# Altium PCB BF706_Core.PcbDoc (part 1 of 2)
Units mil, origin at the board's own origin, x right, y up, seen from the top; angles counter-clockwise.
Board outline 1878 x 1180 mil, 4 copper layers (Top Layer, GND, PWR, Bottom Layer), stack 40.642 mil thick; 58 components, 77 nets, 288 pads, 225 vias.
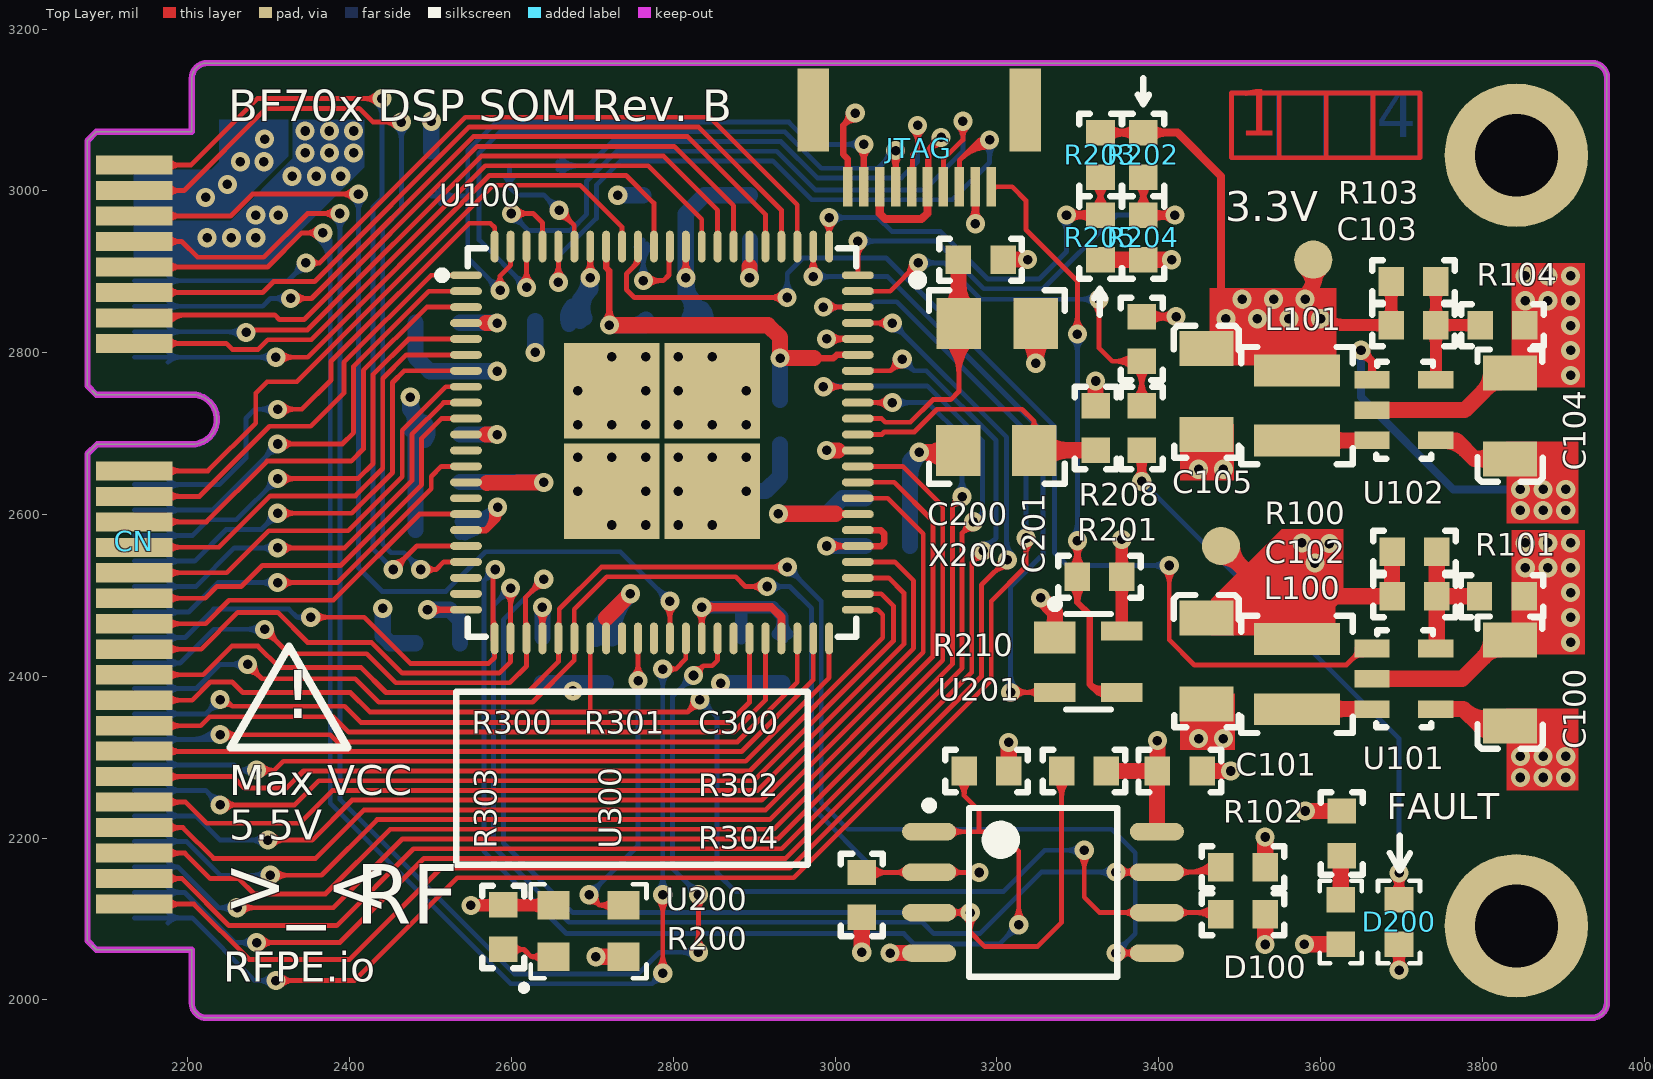
[diagram p0: Top Layer view]
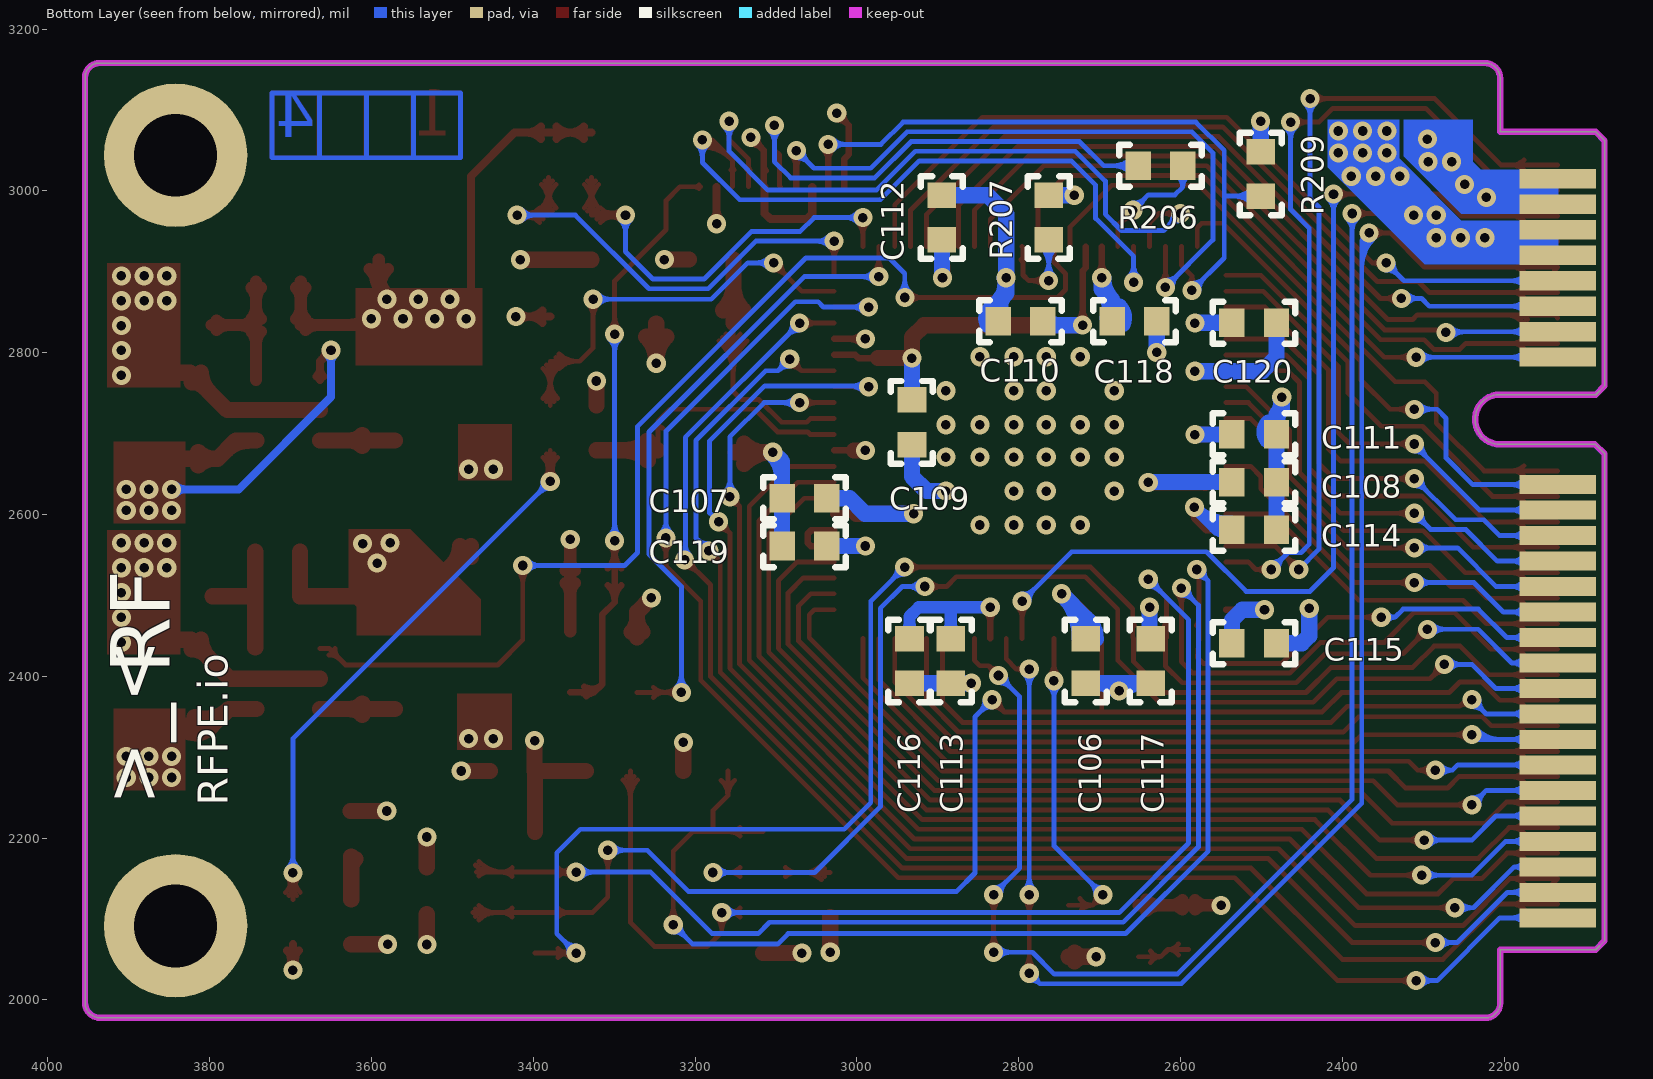
[diagram p1: Bottom Layer view, seen from below]
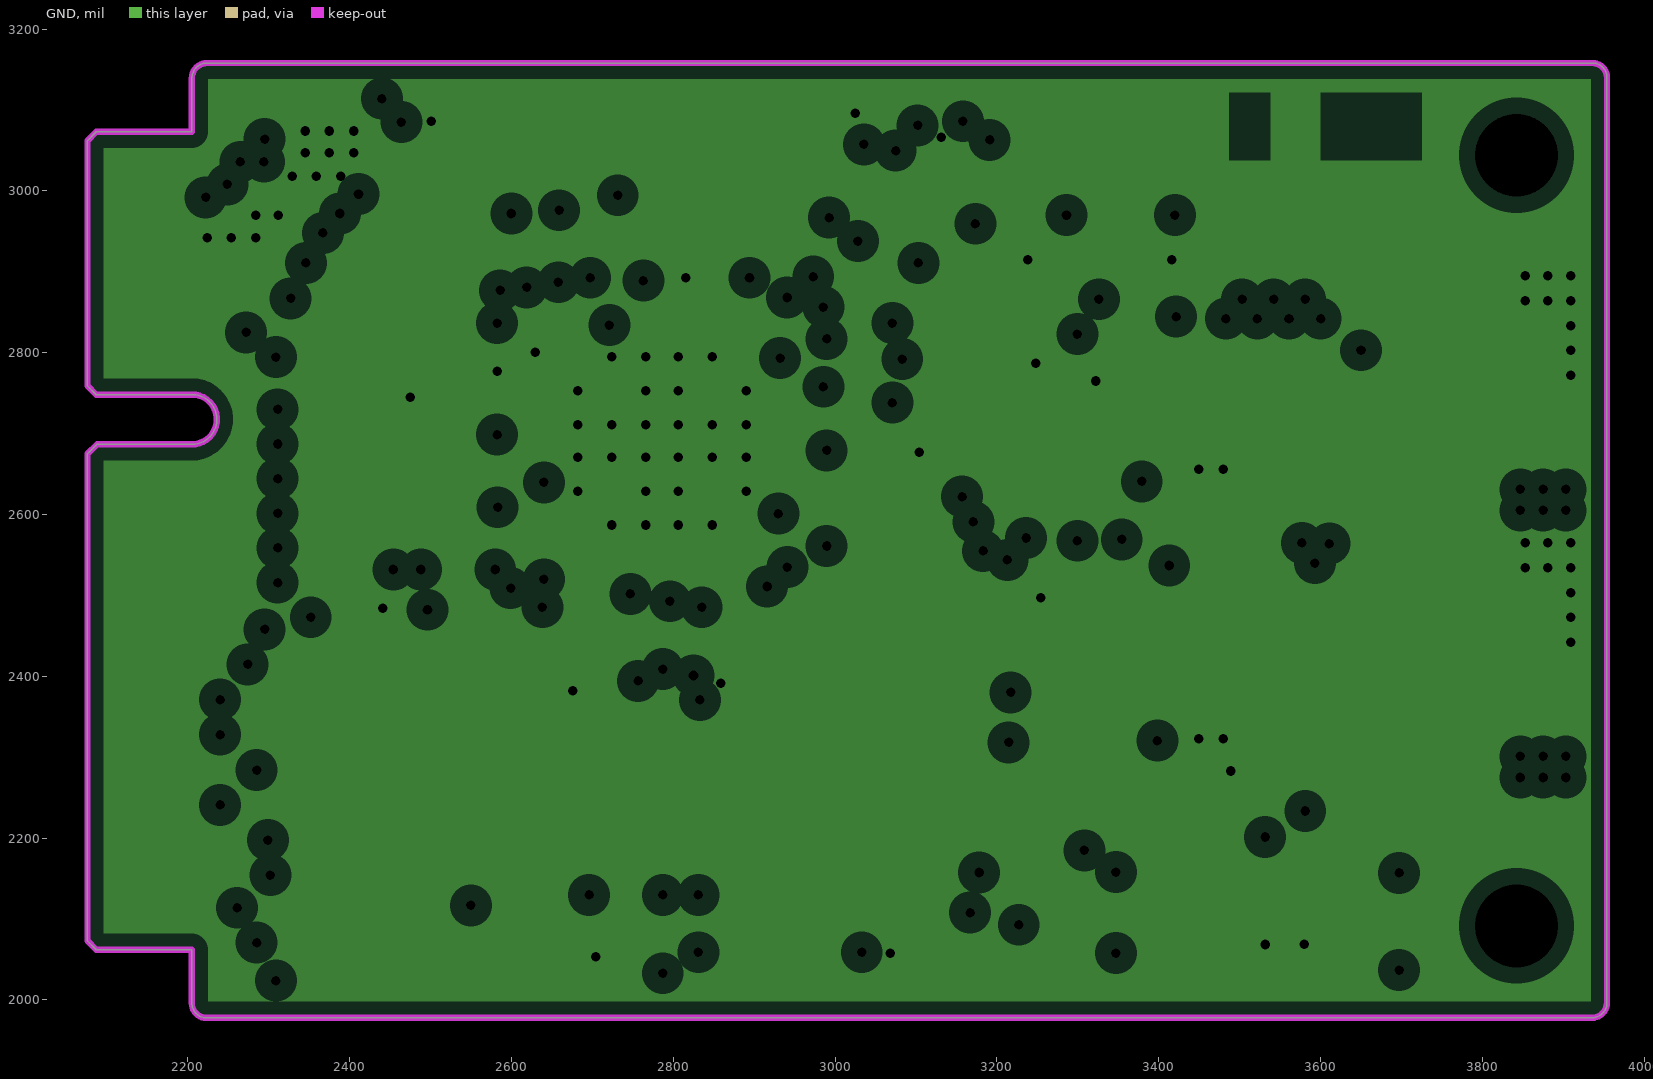
[diagram p2: GND, clearances drawn from the general rule]
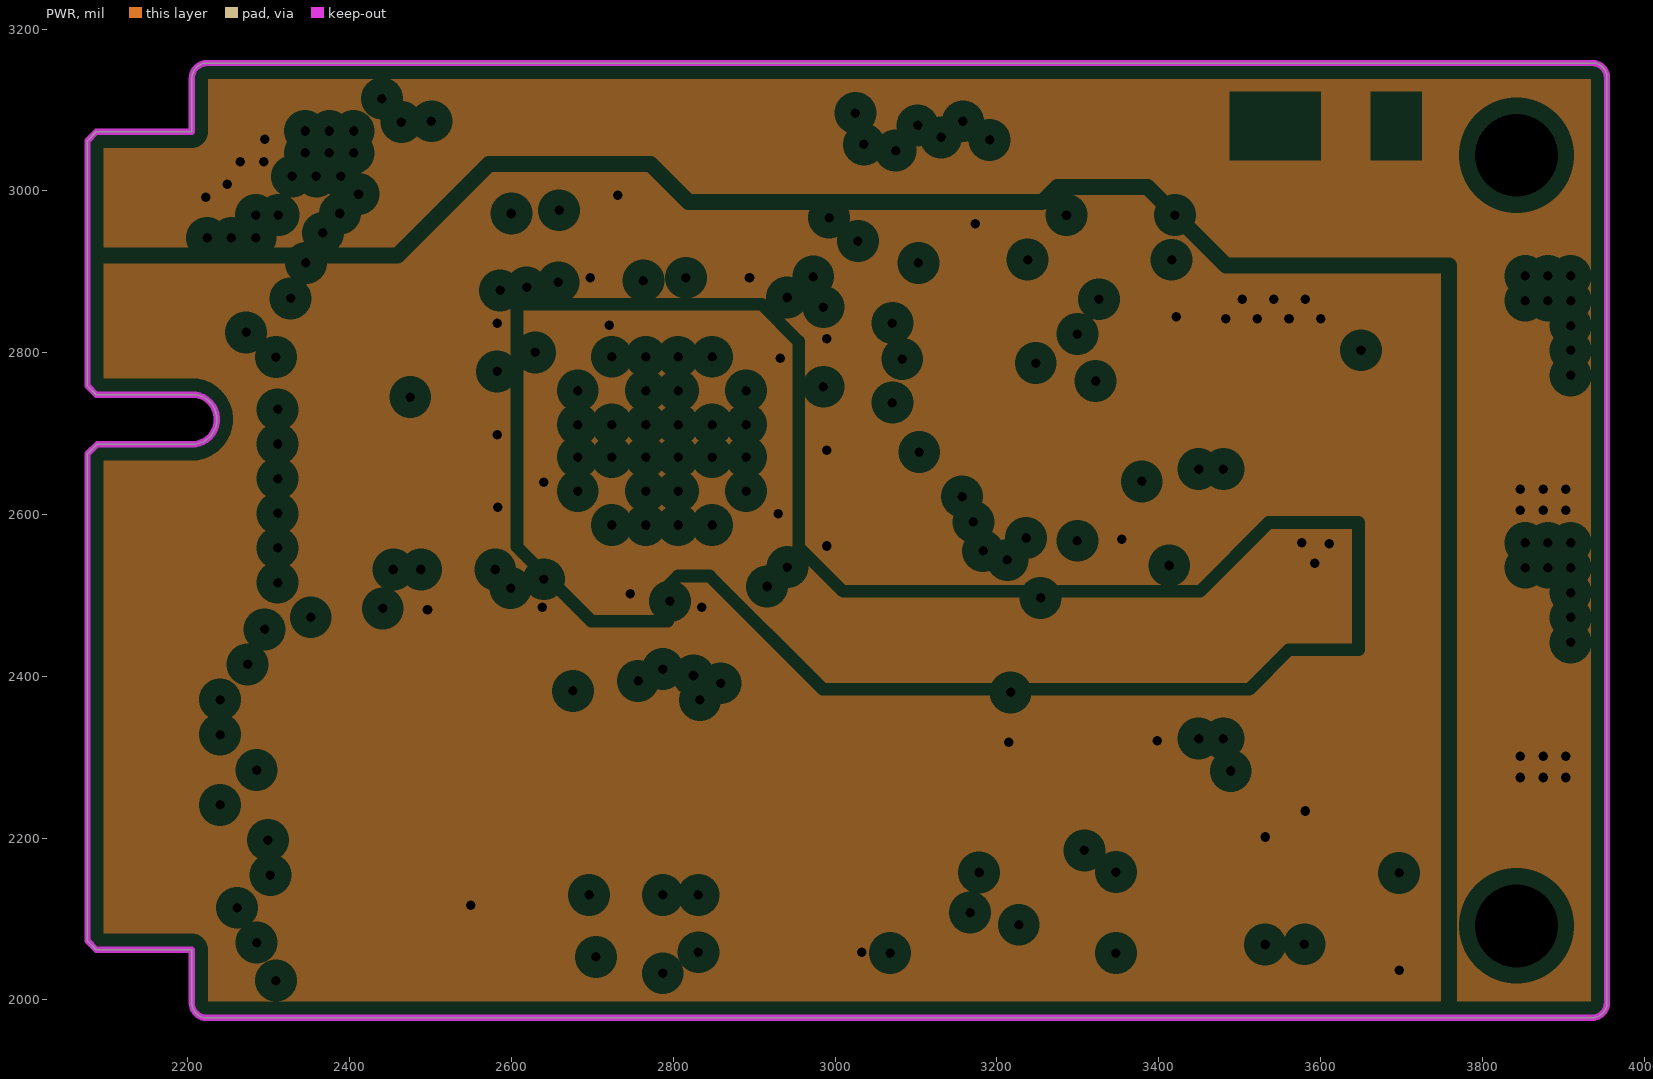
[diagram p3: PWR, clearances drawn from the general rule]

## Layer stack, top to bottom
Top Layer: signal copper 1.4
Dielectric: core 12.6, FR-4, Dk 4.8
GND: plane copper 1.4, net GND
Dielectric: prepreg 9.8425, FR-4, Dk 4.8
PWR: plane copper 1.4, net (Multiple Nets)
Dielectric: core 12.6, FR-4, Dk 4.8
Bottom Layer: signal copper 1.4

## Board outline
2076,2073 2087,2062 2205,2062 2205,1996 ccw(c2223,1996) 2223,1978 3935.25,1978 ccw(c3935.25,1996.75) 3954,1996.75 3954,3140 ccw(c3936,3140) 3936,3158 2224,3158 ccw(c2224,3139) 2205,3139 2205,3073 2087,3073 2076,3062 2076,2759 2087,2748 2210,2748 cw(c2205.2,2717.57) 2209,2687 2088,2687 2076,2675

## Design rules (kind name [scope] priority, off if disabled: settings)
Clearance [All] p1: gap=6
PlaneClearance [All] p1: clearance=20
PlaneConnect [All] p1: planeconnectstyle=Direct reliefexpansion=20 reliefentries=4 reliefconductorwidth=10 reliefairgap=10
PolygonConnect [All] p1: connectstyle=Relief reliefconductorwidth=10 reliefentries=4 polygonreliefangle="90 Angle"
RoutingVias [All] p1: holewidth=28 width=50 viastyle="Through Hole" minholewidth=28 minwidth=50 maxholewidth=28 maxwidth=50
SilkscreenOverComponentPads [All] p1: minsilkscreentomaskgap=10
SolderMaskExpansion [All] p1: expansion=4
Width [All] p1: maxlimit=10000 minlimit=6 preferedwidth=10
25 further rules are at their usual default settings.

## Classes and differential pairs
component class BF706_DSP: C300 CN R300 R301 R302 R303 R304 U100 U300
component class BF706_PWR: C100 C101 C102 C103 C104 C105 C106 C107 C108 C109 C110 C111 C112 C113 C114 C115 C116 C117 C118 C119 C120 D100 L100 R100 R101 R102 R103 R104 U101 U102
component class BF706-Sys: C200 C201 D200 JTAG R200 R201 R202 R203 R204 R205 R206 R207 R208 R209 R210 U200 U201 X200

## Components (designator, comment, footprint, x,y, rotation, side; value= is the part's Value field where it differs from the comment)
C100 "" C1206T 3833,2392 r270 top
C101 "" C1206T 3460,2419 r90 top
C102 "4.7uF" C0603 3716,2499 r180 top
C103 "4.7uF" C0603 3715,2834 r180 top
C104 "" C1206T 3833,2722 r270 top
C105 "" C1206T 3460,2752 r90 top
C106 "100nF" C0603 2717,2419 r270 bottom
C107 "100nF" C0603 3064.9,2620.1 r0 bottom
C108 "100nF" C0603 2509,2640 r180 bottom
C109 "100nF" C0603 2932,2714 r270 bottom
C110 "100nF" C0603 2798,2839 r0 bottom
C111 "100nF" C0603 2509,2699 r180 bottom
C112 "100nF" C0603 2895,2967 r90 bottom
C113 "100nF" C0603 2884,2419 r270 bottom
C114 "100nF" C0603 2509,2581 r180 bottom
C115 "100nF" C0603 2509,2441 r180 bottom
C116 "100nF" C0603 2935,2419 r270 bottom
C117 "100nF" C0603 2637,2419 r270 bottom
C118 "100nF" C0603 2657,2839 r180 bottom
C119 "100nF" C0603 3064.9,2561 r0 bottom
C120 "100nF" C0603 2509,2837 r180 bottom
C200 "18pF" C0603 3180,2915 r0 top
C201 "18pF" C0603 3322,2707 r90 top
C300 "100nF" C0603 3426,2283 r0 top
CN "MINI-PCIE" "PCI-E MALE" 2312,2719.9 r180 top locked
D100 "LED0" LED0603 3626,2097 r270 top
D200 "LED0" LED0603 3696,2095.88 r90 top
JTAG "Header 10" MOLEX-FPC-0.5-10 3116,3115 r180 top
L100 "SRN3015-2R2M" SRN3015 3571,2446 r270 top
L101 "SRN3015-2R2M" SRN3015 3571,2778 r270 top
R100 "10k" R0603 3716,2554 r180 top
R101 "12k" R0603 3824,2499 r180 top
R102 "" R0603 3626,2206 r270 top
R103 "45k" R0603 3715,2888 r180 top
R104 "12k" R0603 3825,2834 r180 top
R200 "10k" R0603 2590,2090 r270 top
R201 "" R0603 3379,2707 r90 top
R202 "10k" R0603 3381,3044.44 r270 top
R203 "DNP" R0603 3328,3044.44 r270 top
R204 "DNP" R0603 3381,2942.44 r270 top
R205 "10k" R0603 3328,2942.44 r270 top
R206 "0R" R0603 2625,3031 r0 bottom
R207 "10k" R0603 2763,2967 r270 bottom
R208 "10k" R0603 3379,2817 r270 top
R209 "10k" R0603 2501,3021 r90 bottom
R210 "10k" R0603 3327,2523 r0 top
R300 "10k" R0603 3187,2283 r180 top
R301 "10k" R0603 3307.5,2283 r180 top
R302 "10k" R0603 3504,2164 r180 top
R303 "10k" R0603 3033,2130 r90 top
R304 "10k" R0603 3504,2106 r0 top
U100 "ADSP-BF706" ADSP-BF706 2786,2689 r0 top locked
U101 "RT8059" APS1006 3703,2397 r0 top
U102 "RT8059" APS1006 3703,2729 r0 top
U200 "XTAL-25M" XTAL-25M-SMD 2709,2085 r0 top
U201 "MAX811" sot143 3313,2418 r0 top
U300 "M25P16" M25P80 3257,2133 r0 top
X200 "ABM3B-25.000MHZ-B2-T" XTAL5032 3199,2756 r270 top

## Footprints (in the part's own frame and the unit in brackets; to place one, negate y for a bottom-side part, rotate by r counter-clockwise, add the part's x,y. Pads: shape width x height; smd on the part's side, far side on the other; paste and mask are expansions set on the pad)
ADSP-BF706 [mm]
  oval 1x0.25 smd: 1(-6.15,5.25) 2(-6.15,4.75) 3(-6.15,4.25) 4(-6.15,3.75) 5(-6.15,3.25) 6(-6.15,2.75) 7(-6.15,2.25) 8(-6.15,1.75) 9(-6.15,1.25) 10(-6.15,0.75) 11(-6.15,0.25) 12(-6.15,-0.25) 13(-6.15,-0.75) 14(-6.15,-1.25) 15(-6.15,-1.75) 16(-6.15,-2.25) 17(-6.15,-2.75) 18(-6.15,-3.25) 19(-6.15,-3.75) 20(-6.15,-4.25) 21(-6.15,-4.75) 22(-6.15,-5.25) 45(6.15,-5.25) 46(6.15,-4.75) 47(6.15,-4.25) 48(6.15,-3.75) 49(6.15,-3.25) 50(6.15,-2.75) 51(6.15,-2.25) 52(6.15,-1.75) 53(6.15,-1.25) 54(6.15,-0.75) 55(6.15,-0.25) 56(6.15,0.25) 57(6.15,0.75) 58(6.15,1.25) 59(6.15,1.75) 60(6.15,2.25) 61(6.15,2.75) 62(6.15,3.25) 63(6.15,3.75) 64(6.15,4.25) 65(6.15,4.75) 66(6.15,5.25)
  oval 0.25x1 smd: 23(-5.25,-6.15) 24(-4.75,-6.15) 25(-4.25,-6.15) 26(-3.75,-6.15) 27(-3.25,-6.15) 28(-2.75,-6.15) 29(-2.25,-6.15) 30(-1.75,-6.15) 31(-1.25,-6.15) 32(-0.75,-6.15) 33(-0.25,-6.15) 34(0.25,-6.15) 35(0.75,-6.15) 36(1.25,-6.15) 37(1.75,-6.15) 38(2.25,-6.15) 39(2.75,-6.15) 40(3.25,-6.15) 41(3.75,-6.15) 42(4.25,-6.15) 43(4.75,-6.15) 44(5.25,-6.15) 67(5.25,6.15) 68(4.75,6.15) 69(4.25,6.15) 70(3.75,6.15) 71(3.25,6.15) 72(2.75,6.15) 73(2.25,6.15) 74(1.75,6.15) 75(1.25,6.15) 76(0.75,6.15) 77(0.25,6.15) 78(-0.25,6.15) 79(-0.75,6.15) 80(-1.25,6.15) 81(-1.75,6.15) 82(-2.25,6.15) 83(-2.75,6.15) 84(-3.25,6.15) 85(-3.75,6.15) 86(-4.25,6.15) 87(-4.75,6.15) 88(-5.25,6.15)
  rect 3x3 smd: 89(-1.575,1.626) 90(1.575,1.626) 91(-1.575,-1.524) 92(1.575,-1.524)
  silkscreen extent -7.02,-6.1 6.1,6.1, body extent -6.05,-6.01 6.01,6.05, height 0.8
APS1006 [mm] "SOT23, 5-Leads, Body 3.0x2.6mm (max), Pitch 0.95mm, IPC Medium Density"
  rect 1.1x0.55 smd: 1(-1,0.95) 2(-1,0) 3(-1,-0.95) 4(1,-0.95) 5(1,0.95)
  silkscreen extent -0.86,-1.52 0.91,1.52, body extent -1.5,-1.5 1.5,1.5, height 1.42
C0603 [mm]
  rect 0.8x0.9 smd: 1(-0.7,0) 2(0.7,0)
  silkscreen extent -1.3,-0.66 1.3,0.66, body extent -0.86,-0.43 0.86,0.43, height 0.5
C1206T [mm]
  rect 1.1x1.7 smd: 1(1.35,0.025) 2(-1.35,0.025)
  silkscreen extent -2.08,-0.99 2.07,1.05, body extent -1.78,-0.81 1.77,0.86, height 1.01
LED0603 [mm]
  rect 0.8x0.9 smd: 1(-0.686,-0.025) 2(0.714,-0.025)
  silkscreen extent -1.28,-0.69 1.31,0.63, body extent -0.84,-0.48 0.86,0.42, height 0.9
M25P80 [mm] "SOIC, 8-Leads, Body 5.3x5.4mm (max), Pitch 1.27mm, IPC Medium Density"
  oval 1.7x0.55 smd: 1(-3.575,1.905) 2(-3.575,0.635) 3(-3.575,-0.635) 4(-3.575,-1.905) 5(3.575,-1.905) 6(3.575,-0.635) 7(3.575,0.635) 8(3.575,1.905)
  silkscreen extent -3.7,-2.65 2.33,2.85, body extent -4.05,-2.73 4.05,2.73, height 1.75
MOLEX-FPC-0.5-10 [mm]
  rect 0.3x1.25 smd: 1(-1.956,2.794) 2(-1.456,2.794) 3(-0.956,2.794) 4(-0.456,2.794) 5(0.044,2.794) 6(0.544,2.794) 7(1.044,2.794) 8(1.544,2.794) 9(2.044,2.794) 10(2.544,2.794)
  rect 1x2.6 smd: NC(-3.023,0.381) NC(3.632,0.381)
  body extent -3.27,-1.24 3.83,2.81, height 1.15
"PCI-E MALE" [mm]
  rect 2.4x0.6 smd: 1(4.521,-7.925) 3(4.521,-7.125) 5(4.521,-6.325) 7(4.521,-5.525) 9(4.521,-4.725) 11(4.521,-3.925) 13(4.521,-3.125) 15(4.521,-2.325) 17(4.521,1.675) 19(4.521,2.475) 21(4.521,3.275) 23(4.521,4.075) 25(4.521,4.875) 27(4.521,5.675) 29(4.521,6.475) 31(4.521,7.275) 33(4.521,8.075) 35(4.521,8.875) 37(4.521,9.675) 39(4.521,10.475) 41(4.521,11.275) 43(4.521,12.075) 45(4.521,12.875) 47(4.521,13.675) 49(4.521,14.475) 51(4.521,15.275)
  rect 2.4x0.6 smd far side: 2(4.521,-7.493) 4(4.521,-6.693) 6(4.521,-5.893) 8(4.521,-5.093) 10(4.521,-4.293) 12(4.521,-3.493) 14(4.521,-2.693) 16(4.521,-1.893) 18(4.521,2.107) 20(4.521,2.907) 22(4.521,3.707) 24(4.521,4.507) 26(4.521,5.307) 28(4.521,6.107) 30(4.521,6.907) 32(4.521,7.707) 34(4.521,8.507) 36(4.521,9.307) 38(4.521,10.107) 40(4.521,10.907) 42(4.521,11.707) 44(4.521,12.507) 46(4.521,13.307) 48(4.521,14.107) 50(4.521,14.907) 52(4.521,15.707)
R0603 [mm]
  rect 0.8x0.9 smd: 1(-0.7,0) 2(0.7,0)
  silkscreen extent -1.3,-0.66 1.3,0.66, body extent -0.86,-0.43 0.86,0.43, height 0.5
sot143 [mm] "SOT143, 4-Leads, Body 3.0x2.6mm (max), Pitch 1.92mm, IPC Medium Density"
  rect 1.3x1 smd: 1(-1.05,0.76)
  rect 1.3x0.6 smd: 2(-1.05,-0.96) 3(1.05,-0.96) 4(1.05,0.96)
  silkscreen extent -1.17,-1.5 0.7,1.93, body extent -1.21,-1.46 1.21,1.46, height 1
SRN3015 [mm]
  rect 1x2.7 smd: 1(0,0) 2(2.2,0)
  silkscreen extent -0.74,-1.75 2.95,1.75, body extent -0.41,-1.5 2.59,1.5, height 1.5
XTAL5032 [mil]
  rect 62.99x55.12 smd: 1(-80,-46) 2(77,-47) 3(77,47) 4(-80,49)
  silkscreen extent -140,-103 118,85, body extent -99,-64 97,64, height 39
XTAL-25M-SMD [mm]
  rect 1x0.9 smd: 1(-1.448,-0.803) 2(0.752,-0.803) 3(0.752,0.813) 4(-1.448,0.813)
  silkscreen extent -2.47,-1.87 1.47,1.47, body extent -1.93,-1.24 1.27,1.26, height 0.61

## Part data
C100 C101 C104 C105: library part "Cap Pol2", "Polarized Capacitor (Axial)"
C102 C103 C106 C107 C108 C109 C110 C111 C112 C113 C114 C115 C116 C117 C118 C119 C120 C200 C201 C300: library part Cap, "Capacitor"
D100 D200: "Typical INFRARED GaAs LED"
JTAG: "Header, 10-Pin"
L100 L101 R100 R101 R102 R103 R104 R200 R201 R202 R203 R204 R205 R206 R207 R208 R209 R210 R300 R301 R302 R303 R304: library part Res1, "Resistor"
X200: library part XTAL-25M-SMD

## Free pads (board coordinates)
  round 47.24 smd: 1(3477,2561) 1(3591,2915)
  round 177.17 hole 102.36: SCREW(3842,2091.63) SCREW(3842,3044)

## Via types
v1: diameter 23.62, hole 11.81, Top Layer to Bottom Layer, tented both sides, 225 vias

## Nets (pads, with @x,y where several pads share a name; then routed paths per layer and width w, separated by ;. In a path a pad name is that pad's centre, name@x,y a point inside that pad or via, vN(x,y) a via of type N, cw(c..) or ccw(c..) an arc to the next point about the centre after c; other vN are vias at no path point)
D3V3: C103.2 C105.1 C111.1 C112.1 C113.1 C114.1 C115.1 C116.1 C117.1 C118.1 C119.1 C120.1 C300.1 D200.1 JTAG.2 L101.1 pad.1@3591,2915 R102.1 R103.2 R200.1 R202.1 R203.1 R207.1 R208.1 R210.2 R300.1 R301.1 R302.1 R303.1 U100.4 U100.11 U100.17 U100.22 U100.26 U100.36 U100.41 U100.49 U100.50 U100.55 U100.62 U100.72 U100.82 U200.4 U201.4 U300.8 | length 4004.9
  Top Layer w8: v1(2496.31,2482.31) U100.22@2543.87,2482.31 ; v1@2501.83,2476.78 cw(c2515.16,2463.45) 2515.16,2482.31 cw(c2515.16,2501.16) v1@2501.83,2487.83 ; U100.17@2543.87,2580.73 2568.54,2580.73 ; U100.11@2543.87,2698.84 2568.54,2698.84 ; U100.4@2543.87,2836.64 2568.54,2836.64 ; v1@2575.47,2606.93 cw(c2549.49,2599.79) 2568.54,2580.73 ; v1@2575.67,2694.81 ccw(c2568.54,2690.52) 2568.54,2698.84 ; v1@2575.67,2702.87 cw(c2568.54,2707.17) 2568.54,2698.84 ; v1@2575.67,2832.61 ccw(c2568.54,2828.31) 2568.54,2836.64 ; v1@2575.67,2840.67 cw(c2568.54,2844.96) 2568.54,2836.64 ; v1@2576.84,2693.32 ccw(c2563.5,2679.99) 2563.5,2698.84 ccw(c2563.5,2717.7) v1@2576.84,2704.37 ; v1@2576.84,2831.11 ccw(c2563.5,2817.78) 2563.5,2836.64 ccw(c2563.5,2855.5) v1@2576.84,2842.16 ; 2578.27,2590.46 ccw(c2564.74,2603.98) v1@2583.18,2609.05 ; v1@2578.98,2602.3 cw(c2574.7,2595.19) 2583,2595.19 ; v1(2583,2609) 2583,2595.19 ; v1@2587.02,2602.3 ccw(c2591.3,2595.19) 2583,2595.19 ; v1@2632.84,2479.84 cw(c2619.5,2466.5) 2638.36,2466.5 cw(c2657.22,2466.5) v1@2643.89,2479.84 ; U100.26@2638.36,2446.87 v1(2638.36,2485.36) ; v1@2691.89,2898.16 ccw(c2678.56,2911.5) 2697.42,2911.5 ccw(c2716.27,2911.5) v1@2702.94,2898.16 ; v1(2697.42,2892.64) U100.82@2697.42,2931.13 ; v1@2829.69,2479.84 cw(c2816.36,2466.5) 2835.21,2466.5 cw(c2854.07,2466.5) v1@2840.74,2479.84 ; U100.36@2835.21,2446.87 v1(2835.21,2485.36) ; v1@2888.74,2898.16 ccw(c2875.41,2911.5) 2894.27,2911.5 ccw(c2913.13,2911.5) v1@2899.79,2898.16 ; v1@2890.24,2899.33 ccw(c2885.94,2906.46) 2894.27,2906.46 ; U100.72@2894.27,2931.13 2894.27,2906.46 ; v1@2898.3,2899.33 cw(c2902.59,2906.46) 2894.27,2906.46 ; v1(2989.64,2561.05) U100.49@3028.13,2561.05 3057.05,2561.05 3061,2565 3061,2576 3056.27,2580.73 U100.50@3028.13,2580.73 ; v1(2989.64,2816.95) U100.62@3028.13,2816.95 ; v1@2995.16,2555.52 cw(c3008.5,2542.19) 3008.5,2561.05 cw(c3008.5,2579.9) v1@2995.16,2566.57 ; v1@2995.16,2673.63 cw(c3008.5,2660.3) 3008.5,2679.16 cw(c3008.5,2698.01) v1@2995.16,2684.68 ; v1@2995.16,2811.43 cw(c3008.5,2798.1) 3008.5,2816.95 cw(c3008.5,2835.81) v1@2995.16,2822.48 ; v1@2996.33,2675.13 cw(c3003.46,2670.83) 3003.46,2679.16 ; v1@2996.33,2683.19 ccw(c3003.46,2687.48) 3003.46,2679.16 ; U100.55@3028.13,2679.16 3003.46,2679.16 ; 2568.54,2580.73 2583,2595.19
  Top Layer w10: v1(2835.21,2485.36) 2921.64,2485.36 2933.64,2473.36 U100.41@2933.64,2446.87 ; v1@2840.03,2480.55 cw(c2851.66,2468.92) 2851.66,2485.36 cw(c2851.66,2501.81) v1@2840.03,2490.18 ; v1@3168.5,2964.13 ccw(c3156.87,2975.76) 3173.32,2975.76 ccw(c3189.76,2975.76) v1@3178.13,2964.13 ; v1(3173.32,2959.32) JTAG.2@3173.32,3005 ; R203.1@3328,3072 R202.1@3381,3072 3423,3072 3477,3018 3477,2870 ; R203.1@3337.57,3064.4 cw(c3355.92,3046.05) 3355.92,3072 cw(c3355.92,3097.95) R203.1@3337.57,3079.6 ; R202.1@3371.43,3064.4 ccw(c3353.08,3046.05) 3353.08,3072 ccw(c3353.08,3097.95) R202.1@3371.43,3079.6 ; R208.1@3379,2844.56 v1(3421.44,2844.56) ; R208.1@3388.57,2836.96 cw(c3406.92,2818.61) 3406.92,2844.56 cw(c3406.92,2870.51) R208.1@3388.57,2852.16 ; R202.1@3390.57,3064.4 cw(c3408.92,3046.05) 3408.92,3072 cw(c3408.92,3097.95) R202.1@3390.57,3079.6 ; v1@3416.62,2839.74 ccw(c3405,2828.12) 3405,2844.56 ccw(c3405,2861) v1@3416.62,2849.38 ; D200.1@3689.4,2061.28 cw(c3671.05,2042.93) 3697,2042.93 cw(c3722.95,2042.93) D200.1@3704.6,2061.28 ; v1@3691.68,2041.25 ccw(c3681,2049.8) D200.1@3694.21,2053.34 ; v1@3692.18,2041.82 ccw(c3680.56,2053.44) 3697,2053.44 ccw(c3713.44,2053.44) v1@3701.82,2041.82 ; v1@3693.59,2042.9 ccw(c3687.99,2052.6) 3698.81,2049.7 ; 3695.19,2049.7 ccw(c3706.01,2052.6) v1@3700.41,2042.9 ; v1(3697,2037) D200.1@3697,2068.88 ; D200.1@3699.79,2053.34 ccw(c3713,2049.8) v1@3702.32,2041.25
  Top Layer w15: v1(2550,2117) U200.4@2652,2117 ; 2566.77,2117 ccw(c2566.77,2138.82) R200.1@2582.2,2123.39 ; 2569.47,2117 cw(c2569.47,2099) R200.1@2582.2,2111.73 ; R200.1@2597.8,2111.73 cw(c2610.53,2099) 2610.53,2117 ; R200.1@2597.8,2123.39 ccw(c2613.23,2138.82) 2613.23,2117 ; U200.4@2642.81,2109.78 ccw(c2625.37,2092.34) 2625.37,2117 ccw(c2625.37,2141.66) U200.4@2642.81,2124.22 ; R210.2@3348.73,2515.2 cw(c3335.18,2501.65) 3354.34,2501.65 ; R210.2@3348.73,2530.8 ccw(c3335.18,2544.35) 3354.34,2544.35 ; U201.4@3354.34,2455.8 v1(3354.34,2569.34) ; 3354.34,2500.59 cw(c3375,2500.59) R210.2@3360.39,2515.2 ; 3354.34,2545.41 ccw(c3375,2545.41) R210.2@3360.39,2530.8 ; v1@3577.95,2869.05 ccw(c3546.45,2900.55) pad.1@3591,2900.55 ; v1@3578.84,2869.73 ccw(c3561.6,2899.59) 3594.91,2890.67 ; v1@3579.16,2869.9 ccw(c3567.25,2895.08) 3594.16,2887.87 ; pad.1@3579.6,2903.6 cw(c3552.08,2876.08) 3591,2876.08 cw(c3629.92,2876.08) pad.1@3602.4,2903.6 ; v1@3580.02,2861.8 cw(c3576.8,2847.97) v1@3591,2847.97 ; v1@3585.91,2875.49 cw(c3579.49,2863.07) 3592.99,2866.69 ; 3591,2851 pad.1@3591,2915 ; 3591,2874.14 ccw(c3632.14,2874.14) 3603.05,2845.05 ccw(c3629.72,2871.72) 3629.72,2834 ; v1@3605,2834 C103.2@3687.44,2834 R103.2@3687.44,2888 ; C103.2@3681.61,2828.17 ccw(c3667.53,2814.09) 3667.53,2834 ccw(c3667.53,2853.91) C103.2@3681.61,2839.83 ; C103.2@3681.61,2841.8 ccw(c3667.53,2855.88) 3687.44,2855.88 ccw(c3707.35,2855.88) C103.2@3693.27,2841.8 ; R103.2@3681.61,2880.2 cw(c3667.53,2866.12) 3687.44,2866.12 cw(c3707.35,2866.12) R103.2@3693.27,2880.2
  Top Layer w20: 2568.54,2698.84 v1(2582.36,2698.84) ; 2568.54,2836.64 v1(2582.36,2836.64) ; v1(2894.27,2892.64) 2894.27,2906.46 ; v1(2989.64,2679.16) 3003.46,2679.16 ; v1(3033,2059) R303.1@3033,2102.44 ; R300.1@3214.56,2283 v1(3214.56,2318.44) ; R301.1@3335.06,2283 C300.1@3398.44,2283 v1(3398.44,2320.56) ; U300.8@3397.75,2208 C300.1@3397.75,2282.31 ; R302.1@3531.56,2164 v1(3531.56,2201.44) ; v1(3581.12,2233.56) R102.1@3626,2233.56
  Bottom Layer w15: C114.1@2536.24,2576.22 ccw(c2537.68,2606.38) 2559.03,2585.03 ; C114.1@2536.56,2581 2555,2581 ; C114.1@2536.95,2591.21 ccw(c2539.88,2652.12) v1(2583,2609) 2555,2581 ; C114.1@2542.71,2575.5 cw(c2555,2564.51) 2555,2581 ; C114.1@2542.71,2586.5 ccw(c2555,2597.49) 2555,2581 ; v1(2835.21,2485.36) 2923.64,2485.36 2935,2474 C116.1@2935,2446.56 ; C113.1@2878.17,2452.39 ccw(c2864.09,2466.47) 2884,2466.47 ccw(c2903.91,2466.47) C113.1@2889.83,2452.39 ; C113.1@2884,2446.56 2884,2484.36 ; C116.1@2929.17,2452.39 ccw(c2915.09,2466.47) 2935,2466.47 ccw(c2954.91,2466.47) C116.1@2940.83,2452.39
  Bottom Layer w20: v1(2496.31,2482.31) 2523.69,2482.31 2536.56,2469.44 C115.1@2536.56,2441 ; C111.1@2536.56,2699 v1@2582.2,2699 ; C120.1@2536.56,2837 v1@2582,2837 ; C117.1@2638.36,2447.92 v1(2638.36,2485.36) ; C118.1@2671.26,2835.84 cw(c2689.48,2842.87) C118.1@2675.67,2856.67 ; C118.1@2684.56,2839 2684.56,2865.56 ; C118.1@2689.92,2843.04 cw(c2720.87,2854.97) 2697.42,2878.42 ; v1@2695.61,2892.62 cw(c2657.89,2892.23) 2684.56,2865.56 ; v1(2697.42,2892.64) 2697.42,2878.42 ; v1(2731.44,2994.56) R207.1@2763,2994.56 ; v1@2895,2893.37 C112.1@2895,2939.44 ; v1@2989.69,2561 C119.1@3037.34,2561 ; 2684.56,2865.56 2697.42,2878.42
  other v1: 3483,2842 3522,2842 3561,2842 3600,2842 3503,2866 3542,2866 3581,2866
D5V: C100.1 C104.1 CN.2 CN.4 U101.4 U102.1 U102.4 | length 828.1
  Top Layer w10: v1@3650,2796.19 cw(c3650,2779.75) 3661.63,2791.37 cw(c3673.25,2803) v1@3656.81,2803 ; v1(3650,2803) 3663.63,2789.37 U102.1@3663.63,2766.4 ; U102.1@3659.51,2770.52 ccw(c3649.56,2780.47) 3663.63,2780.47 ccw(c3677.7,2780.47) U102.1@3667.75,2770.52
  Top Layer w20: U101.4@3742.37,2359.6 3776.4,2359.6 ; U102.4@3742.37,2691.6 3767.4,2691.6 3790.15,2668.85 C104.1@3834,2668.85 ; U102.4@3753.2,2690.77 cw(c3753.2,2654.48) 3778.86,2680.14 ; 3799.06,2336.94 ccw(c3816.77,2354.64) C100.1@3824.9,2330.96 ; C100.1@3813.27,2331.35 ccw(c3797.15,2317.78) 3797.15,2338.85 ; C100.1@3813.27,2346.35 cw(c3797.15,2359.92) 3797.15,2338.85 ; C104.1@3813.95,2660.61 ccw(c3794.05,2640.72) 3794.05,2668.85 ccw(c3794.05,2696.98) C104.1@3813.95,2677.09 ; C100.1@3818.41,2349.87 cw(c3805.2,2388.39) 3776.4,2359.6 ; C100.1@3834,2338.85 3797.15,2338.85 ; 3776.4,2359.6 3797.15,2338.85
  Bottom Layer w10: v1@3645.18,2798.18 cw(c3633.56,2786.56) 3650,2786.56 cw(c3666.44,2786.56) v1@3654.82,2798.18 ; v1(3650,2803) 3650,2745 3764,2631 v1(3847,2631) ; v1@3842.18,2626.18 ccw(c3830.56,2614.56) 3830.56,2631 ccw(c3830.56,2647.44) v1@3842.18,2635.82
  other v1: 3847,2275 3875,2275 3903,2275 3847,2301 3875,2301 3903,2301 3847,2605 3875,2605 3903,2605 3875,2631 3903,2631 2222,2992 2249,3008 2265,3036 2294,3036 2295,3064
GND: C100.2 C101.2 C104.2 C105.2 C106.2 C107.2 C108.2 C109.2 C110.2 C111.2 C112.2 C113.2 C114.2 C115.2 C116.2 C117.2 C118.2 C119.2 C120.2 C200.2 C201.2 C300.2 CN.6 CN.8 D100.2 JTAG.5 JTAG.8 JTAG.10 R101.1 R104.1 R204.2 R205.2 R209.2 R304.2 U100.76 U100.89 U100.90 U100.91 U100.92 U101.2 U102.2 U200.2 U201.1 U300.4 X200.2 X200.4 | length 2921
  Top Layer w8: v1@2810,2898.16 ccw(c2796.67,2911.5) 2815.53,2911.5 ccw(c2834.38,2911.5) v1@2821.05,2898.16 ; v1(2815.53,2892.64) U100.76@2815.53,2931.13 ; JTAG.10@3015.83,3005 3015.83,3039.17 3010,3045 3010,3081 v1(3025,3096) ; v1@3017.19,3096 cw(c2998.33,3096) 3011.67,3082.67 cw(c3025,3069.33) v1@3025,3088.19 ; JTAG.5@3112.91,3025.05 ccw(c3107.87,3030.09) 3115,3030.09 ; JTAG.5@3114.26,3005 3115,3005.74 3115,3050 v1(3131,3066) ; v1@3123.19,3066 cw(c3104.33,3066) 3117.67,3052.67 cw(c3131,3039.33) v1@3131,3058.19
  Top Layer w10: JTAG.8@3055.2,3005 3055.2,2971.8 3062,2965 3107,2965 3114.26,2972.26 JTAG.5@3114.26,3005
  Top Layer w20: v1(2704.39,2053.39) U200.2@2738.61,2053.39 ; U200.2@2731.18,2047.93 ccw(c2718.01,2034.76) 2718.01,2053.39 ccw(c2718.01,2072.02) U200.2@2731.18,2058.84 ; v1(3068,2058) U300.4@3116.25,2058 ; v1(3104,2677) X200.2@3150,2677 ; v1@3104.93,2677 cw(c3104.93,2628) X200.2@3139.58,2662.65 ; v1@3114.29,2677 ccw(c3114.29,2712.78) X200.2@3139.58,2687.48 ; C200.2@3207.56,2915 v1(3238,2915) ; X200.4@3235.58,2819.65 cw(c3205.61,2789.67) 3248,2789.67 cw(c3290.39,2789.67) X200.4@3260.42,2819.65 ; v1(3248,2787) X200.4@3248,2836 ; v1(3254,2497) 3271.66,2479.34 U201.1@3271.66,2447.92 ; U201.1@3264.81,2454.77 ccw(c3248.28,2471.3) 3271.66,2471.3 ccw(c3295.04,2471.3) U201.1@3278.51,2454.77 ; C201.2@3322,2734.56 v1(3322,2765) ; R205.2@3328,2914.88 R204.2@3381,2914.88 v1(3415.88,2914.88) ; C300.2@3453.56,2283 v1(3489,2283) ; v1(3531.56,2068.56) R304.2@3531.56,2106 ; v1(3580.12,2068.88) D100.2@3625,2068.88 ; U101.2@3663.63,2397 3775,2397 3823.15,2445.15 C100.2@3834,2445.15 ; U102.2@3663.63,2729 3778,2729 3824.15,2775.15 C104.2@3834,2775.15 ; 3800.91,2751.91 ccw(c3777.67,2775.15) C104.2@3810.54,2775.15 ; C100.2@3801.62,2423.62 ccw(c3780.08,2445.15) C100.2@3810.54,2445.15 ; C100.2@3803.94,2425.94 cw(c3822.19,2407.68) C100.2@3822.19,2433.5 ; C104.2@3805.64,2756.64 cw(c3822.19,2740.1) C104.2@3822.19,2763.5
  Bottom Layer w20: v1(2441,2484) 2441,2450 2450,2441 C115.2@2481.44,2441 ; v1(2475,2745) 2475,2730 ; v1@2476.71,2744.4 ccw(c2495.62,2737.74) 2481.44,2723.56 ; C111.2@2476.84,2704.41 ccw(c2461.15,2716.14) 2475,2730 ; C114.2@2481.44,2581 C108.2@2481.44,2640 C111.2@2481.44,2699 2481.44,2723.56 ; C120.2@2481.44,2837 2481.44,2794.56 2499,2777 v1(2582.36,2777) ; C111.2@2491.33,2713.67 cw(c2479.83,2702.17) C111.2@2492.85,2692.43 ; R209.2@2501,3048.56 v1(2501,3086) ; v1(2629.44,2800.44) C118.2@2629.44,2839 ; C117.2@2637,2391.44 C106.2@2717,2391.44 ; C117.2@2648.84,2391.44 cw(c2648.84,2354.84) v1@2674.72,2380.72 ; v1(2676,2382) v1@2676,2390.44 ; v1@2677.28,2380.72 cw(c2703.16,2354.84) C106.2@2703.16,2391.44 ; v1@2817.29,2892.23 ccw(c2847.42,2885.3) 2825.56,2863.44 ; C110.2@2820.41,2843.53 ccw(c2797.16,2855.11) 2815.53,2873.47 ; C110.2@2825.56,2839 2825.56,2863.44 ; C110.2@2835.18,2853.82 cw(c2823.41,2842.04) C110.2@2838.32,2834.62 ; v1(2858.44,2391.44) C113.2@2884,2391.44 C116.2@2935,2391.44 ; v1(2890,2629) 2914,2629 2932,2647 C109.2@2932,2686.44 ; C112.2@2895,2994.56 2838.56,2994.56 2815.53,2971.53 v1(2815.53,2892.64) 2815.53,2873.47 ; C119.2@3092.46,2561 C107.2@3092.46,2620.1 3092.46,2665.46 v1(3104,2677) ; 3092.46,2644.76 cw(c3136.24,2644.76) v1@3105.28,2675.72 ; 2475,2730 2481.44,2723.56 ; 2815.53,2873.47 2825.56,2863.44
  other v1: 3449.25,2323 3480,2323 3909,2442 3909,2472.75 3909,2503.5 3853,2534.25 3881,2534.25 3909,2534.25 3853,2565 3881,2565 3909,2565 2724,2587 2766,2587 2806,2587 2848,2587 2682,2629 2766,2629 2806,2629 3449.25,2656 3480,2656 2682,2671 2724,2671 2766,2671 2806,2671 2848,2671 2890,2671 2682,2711 2724,2711 2766,2711 2806,2711 2848,2711 2890,2711 2682,2753 2766,2753 2806,2753 2890,2753 3909,2772 2724,2795 2766,2795 2806,2795 2848,2795 3909,2802.75 3909,2833.5 3853,2864.25 3881,2864.25 3909,2864.25 3853,2895 3881,2895 3909,2895 2224,2942 2254,2942 2284,2942 2284,2970 2312,2970 2329,3018 2359,3018 2389,3018 2345,3047 2375,3047 2405,3047 2345,3074 2375,3074 2405,3074
JTAG_TARGET_RST: JTAG.1 R210.1 U201.3 | length 1019.5
  Top Layer w6: JTAG.1@3193,3005 3219,3005 3236,2988 3236,2952 3299.44,2888.56 v1(3299.44,2823) ; JTAG.1@3195.05,3002.95 cw(c3200.01,2997.99) 3200.01,3005 cw(c3200.01,3012.01) JTAG.1@3195.05,3007.05 ; v1@3293.21,2829.23 ccw(c3278.17,2844.27) 3299.44,2844.27 ccw(c3320.71,2844.27) v1@3305.67,2829.23
  Top Layer w8: R210.1@3291.13,2512.72 cw(c3271.08,2492.67) 3299.44,2492.67 cw(c3327.8,2492.67) R210.1@3307.75,2512.72 ; R210.1@3291.13,2533.28 ccw(c3271.08,2553.33) 3299.44,2553.33 ccw(c3327.8,2553.33) R210.1@3307.75,2533.28 ; v1@3293.92,2562.04 cw(c3280.58,2548.7) 3299.44,2548.7 cw(c3318.3,2548.7) v1@3304.96,2562.04 ; v1(3299.44,2567.56) R210.1@3299.44,2523 3299.44,2491.56 3315,2476 3315,2390 ; 3322.46,2382.54 ccw(c3333.2,2393.28) U201.3@3340.65,2380.04 ; U201.3@3334.34,2375.47 ccw(c3324.8,2368.2) 3324.8,2380.2 ; U201.3@3334.34,2384.94 cw(c3324.8,2392.2) 3324.8,2380.2 ; U201.3@3336.73,2387.01 cw(c3327.83,2402.83) 3315,2390 ; U201.3@3354.34,2380.2 3324.8,2380.2 ; 3315,2390 3324.8,2380.2
  Bottom Layer w6: v1@3293.21,2573.79 ccw(c3278.17,2588.83) 3299.44,2588.83 ccw(c3320.71,2588.83) v1@3305.67,2573.79 ; v1@3293.21,2816.77 cw(c3278.17,2801.73) 3299.44,2801.73 cw(c3320.71,2801.73) v1@3305.67,2816.77 ; v1(3299.44,2567.56) v1(3299.44,2823)
JTG_TCK: JTAG.4 U100.85 | length 1016.3
  Top Layer w6: v1(2600,2972) 2627,2972 2638.36,2960.64 U100.85@2638.36,2931.13 ; v1@2606.23,2965.77 cw(c2621.27,2950.73) 2621.27,2972 cw(c2621.27,2993.27) v1@2606.23,2978.23 ; JTAG.4@3131.89,3025.76 ccw(c3126.93,3030.72) 3133.95,3030.72 ccw(c3140.96,3030.72) JTAG.4@3136,3025.76 ; JTAG.4@3133.95,3005 3133.95,3038.95 3158,3063 v1(3158,3086) ; v1@3151.77,3079.77 cw(c3136.73,3064.73) 3158,3064.73 cw(c3179.27,3064.73) v1@3164.23,3079.77
  Bottom Layer w6: v1@2600,2963.19 cw(c2600,2941.92) 2615.04,2956.96 cw(c2630.08,2972) v1@2608.81,2972 ; v1(2600,2972) 2621,2951 2673,2951 2693,2971 2693,3012.03 2729.97,3049 2928,3049 2976,3001 3110,3001 3158,3049 v1(3158,3086) ; v1@3151.77,3079.77 cw(c3136.73,3064.73) 3158,3064.73 cw(c3179.27,3064.73) v1@3164.23,3079.77
JTG_TDI: JTAG.7 U100.86 | length 969.1
  Top Layer w6: v1@2612.45,2886.91 ccw(c2597.41,2901.95) 2618.68,2901.95 ccw(c2639.95,2901.95) v1@2624.91,2886.91 ; v1(2618.68,2880.68) U100.86@2618.68,2931.13
  Top Layer w8: v1@3069.37,3044.27 cw(c3056.03,3030.94) 3074.89,3030.94 cw(c3093.75,3030.94) v1@3080.41,3044.27 ; JTAG.7@3074.89,3005 v1(3074.89,3049.8)
  Bottom Layer w6: v1@2609.87,2880.68 ccw(c2588.59,2880.68) 2603.64,2895.72 ccw(c2618.68,2910.76) v1@2618.68,2889.49 ; v1(2618.68,2880.68) 2560,2939.35 2560,3047.03 2585.97,3073 2937.94,3073 2982.94,3028 3053.09,3028 v1(3074.89,3049.8) ; v1@3066.08,3049.8 cw(c3044.81,3049.8) 3059.85,3034.75 cw(c3074.89,3019.71) v1@3074.89,3040.98
JTG_TDO: JTAG.6 R206.2 | length 762.2
  Top Layer w6: JTAG.6@3092.52,3025.76 ccw(c3084.84,3033.43) 3095.7,3033.43 ; JTAG.6@3094.57,3005 3095.7,3006.13 3095.7,3044.7 3102,3051 v1(3102,3081) ; v1@3095.77,3074.77 cw(c3080.73,3059.73) 3102,3059.73 cw(c3123.27,3059.73) v1@3108.23,3074.77
  Bottom Layer w6: R206.2@2652.56,3031 2695,3031 2725,3061 2932.97,3061 2977.97,3016 3082,3016 3102,3036 v1(3102,3081) ; R206.2@2657.33,3026.23 cw(c2668.85,3014.71) 2668.85,3031 cw(c2668.85,3047.29) R206.2@2657.33,3035.77 ; R206.2@2661.57,3021.99 cw(c2683.34,3000.22) 2683.34,3031 cw(c2683.34,3061.78) R206.2@2661.57,3040.01 ; v1@3095.77,3074.77 cw(c3080.73,3059.73) 3102,3059.73 cw(c3123.27,3059.73) v1@3108.23,3074.77
JTG_TMS: JTAG.3 U100.84 | length 1034.4
  Top Layer w6: v1@2651.82,2893.28 ccw(c2636.78,2908.32) 2658.05,2908.32 ccw(c2679.32,2908.32) v1@2664.28,2893.28 ; v1(2658.05,2887.05) U100.84@2658.05,2931.13 ; JTAG.3@3151.58,3025.76 ccw(c3146.62,3030.72) 3153.63,3030.72 ccw(c3160.64,3030.72) JTAG.3@3155.68,3025.76 ; JTAG.3@3153.63,3005 3153.63,3037.63 3179,3063 ; 3155.47,3039.47 cw(c3191,3003.95) v1@3191,3054.19 ; 3165.72,3049.72 cw(c3191,3024.43) v1@3191,3060.19 ; 3175.96,3059.96 cw(c3191,3044.92) v1@3191,3066.19 ; v1@3182.59,3060.36 ccw(c3179,3059.23) 3179,3063 ; v1@3182.59,3065.64 cw(c3179,3066.77) 3179,3063 ; v1(3191,3063) 3179,3063
  Bottom Layer w6: v1@2651.82,2893.28 ccw(c2636.78,2908.32) 2658.05,2908.32 ccw(c2679.32,2908.32) v1@2664.28,2893.28 ; v1(2658.05,2887.05) 2658.05,2919.08 2705,2966.03 2705,3007.06 2734.94,3037 2923.03,3037 2971.03,2989 3145,2989 3191,3035 v1(3191,3063) ; v1@3184.77,3056.77 cw(c3169.73,3041.73) 3191,3041.73 cw(c3212.27,3041.73) v1@3197.23,3056.77
JTG_TRST: JTAG.9 R209.1 U100.87 | length 1057.4
  Top Layer w6: v1@2580.6,2883.96 ccw(c2572.02,2895) 2586,2895 ; v1(2586,2877) 2586,2895 ; v1@2591.4,2883.96 cw(c2599.98,2895) 2586,2895 ; U100.87@2598.99,2931.13 2598.99,2907.99 2586,2895
  Top Layer w8: v1@3030,3051.96 cw(c3016.66,3038.62) 3035.52,3038.62 cw(c3054.38,3038.62) v1@3041.04,3051.96 ; JTAG.9@3035.52,3005 v1(3035.52,3057.48)
  Bottom Layer w6: R209.1@2501,2993.44 2545.56,2993.44 ; R209.1@2507.74,2988.67 cw(c2519.26,2977.15) 2519.26,2993.44 cw(c2519.26,3009.73) R209.1@2507.74,2998.21 ; R209.1@2511.98,2984.43 cw(c2533.74,2962.66) 2533.74,2993.44 cw(c2533.74,3024.22) R209.1@2511.98,3002.46 ; v1@2577.19,2877 ccw(c2555.92,2877) 2570.96,2892.04 ccw(c2586,2907.08) v1@2586,2885.81 ; v1(2586,2877) 2546,2917 2546,3050 2581,3085 2942.91,3085 2970.43,3057.48 v1(3035.52,3057.48) ; v1@3029.29,3051.25 ccw(c3014.25,3036.21) 3014.25,3057.48 ccw(c3014.25,3078.75) v1@3029.29,3063.71
NetC102_1: C102.1 R100.1 R101.2 U101.5 | length 171.3
  Top Layer w20: U101.5@3743.56,2435.59 C102.1@3743.56,2499 ; R100.1@3743.56,2554 C102.1@3743.56,2499 ; R101.2@3796.44,2499 C102.1@3743.56,2499
NetC103_1: C103.1 R103.1 R104.2 U102.5 | length 332.7
  Top Layer w15: C103.1@3736.73,2826.2 cw(c3722.65,2812.12) 3742.56,2812.12 cw(c3762.47,2812.12) C103.1@3748.39,2826.2 ; C103.1@3736.73,2841.8 ccw(c3722.65,2855.88) 3742.56,2855.88 ccw(c3762.47,2855.88) C103.1@3748.39,2841.8 ; R103.1@3736.73,2880.2 cw(c3722.65,2866.12) 3742.56,2866.12 cw(c3762.47,2866.12) R103.1@3748.39,2880.2 ; U102.5@3742.56,2766.59 C103.1@3742.56,2834 ; R103.1@3742.56,2888 C103.1@3742.56,2834 ; C103.1@3748.39,2828.17 cw(c3762.47,2814.09) 3762.47,2834 cw(c3762.47,2853.91) C103.1@3748.39,2839.83 ; R104.2@3791.61,2828.17 ccw(c3777.53,2814.09) 3777.53,2834 ccw(c3777.53,2853.91) R104.2@3791.61,2839.83 ; R104.2@3797.44,2834 C103.1@3742.56,2834
NetD100_1: D100.1 R102.2 | length 66.9
  Top Layer w20: R102.2@3619.97,2174.38 cw(c3607.82,2162.23) 3625,2162.23 ; D100.1@3625,2124 R102.2@3625,2177.44
NetD200_2: D200.2 R201.1 | length 1067.5
  Top Layer w6: R201.1@3369.99,2670.43 cw(c3348.22,2648.66) 3379,2648.66 cw(c3409.78,2648.66) R201.1@3388.01,2670.43 ; v1@3372.45,2646.89 ccw(c3361.35,2656.87) 3375.77,2660.73 ; v1@3372.77,2647.23 ccw(c3357.73,2662.27) 3379,2662.27 ccw(c3400.27,2662.27) v1@3385.23,2647.23 ; R201.1@3374.23,2674.67 cw(c3362.71,2663.15) 3379,2663.15 cw(c3395.29,2663.15) R201.1@3383.77,2674.67 ; v1@3374.59,2648.63 ccw(c3367.35,2661.19) 3381.35,2657.43 ; 3376.65,2657.43 ccw(c3390.65,2661.19) v1@3383.41,2648.63 ; v1(3379,2641) R201.1@3379,2679.44 ; 3382.23,2660.73 ccw(c3396.65,2656.87) v1@3385.55,2646.89 ; D200.2@3687.99,2133.01 ccw(c3666.22,2154.78) 3697,2154.78 ccw(c3727.78,2154.78) D200.2@3706.01,2133.01 ; v1@3690.51,2151.04 cw(c3682.1,2143.31) 3693.13,2140.35 cw(c3705.71,2136.98) v1@3700.52,2148.92 ; v1@3690.77,2150.77 cw(c3675.73,2135.73) 3697,2135.73 cw(c3718.27,2135.73) v1@3703.23,2150.77 ; D200.2@3692.23,2128.77 ccw(c3680.71,2140.29) 3697,2140.29 ccw(c3713.29,2140.29) D200.2@3701.77,2128.77 ; v1@3693.48,2148.92 cw(c3688.29,2136.98) 3700.87,2140.35 cw(c3711.9,2143.31) v1@3703.49,2151.04 ; D200.2@3697,2124 v1(3697,2157)
  Bottom Layer w6: v1@3379,2632.19 cw(c3379,2610.92) 3394.04,2625.96 cw(c3409.08,2641) v1@3387.81,2641 ; v1(3379,2641) 3697,2323 v1(3697,2157) ; v1@3690.77,2163.23 ccw(c3675.73,2178.27) 3697,2178.27 ccw(c3718.27,2178.27) v1@3703.23,2163.23
NetL100_2: L100.2 U101.3 | length 129.1
  Top Layer w20: L100.2@3571.21,2359.6 U101.3@3663.63,2359.6 ; L100.2@3611.31,2352.54 cw(c3628.36,2335.49) 3628.36,2359.6 ; L100.2@3611.31,2366.23 ccw(c3627.33,2382.25) 3627.33,2359.6
NetL101_2: L101.2 U102.3 | length 129.1
  Top Layer w20: L101.2@3571.21,2691.6 U102.3@3663.63,2691.6 ; L101.2@3611.31,2684.54 cw(c3628.36,2667.49) 3628.36,2691.6 ; L101.2@3611.31,2698.23 ccw(c3627.33,2714.25) 3627.33,2691.6
NetR200_2: R200.2 U200.1 | length 127
  Top Layer w6: R200.2@2590,2062.44 2615.56,2062.44 ; R200.2@2602.63,2055.46 cw(c2615.56,2046.99) 2615.56,2062.44 ; R200.2@2602.63,2069.43 ccw(c2615.56,2077.89) 2615.56,2062.44 ; U200.1@2637.27,2046.06 ccw(c2624.62,2038.8) 2624.62,2053.39 ; U200.1@2637.27,2060.71 cw(c2624.62,2067.98) 2624.62,2053.39 ; U200.1@2652,2053.39 2624.61,2053.39 ; 2615.56,2062.44 2624.61,2053.39
NetR206_1: R206.1 U100.83 | length 252.2
  Top Layer w6: v1@2659,2967.19 cw(c2659,2945.92) 2674.04,2960.96 cw(c2689.08,2976) v1@2667.81,2976 ; v1(2659,2976) 2677.73,2957.27 U100.83@2677.73,2931.13
  Bottom Layer w6: R206.1@2590.14,3018.58 cw(c2580.33,3004.56) 2597.44,3004.56 ; R206.1@2597.44,3031 2597.44,3004.56 ; R206.1@2604.75,3018.58 ccw(c2614.56,3004.56) 2597.44,3004.56 ; v1@2650.19,2976 ccw(c2628.92,2976) 2643.96,2991.04 ccw(c2659,3006.08) v1@2659,2984.81 ; v1(2659,2976) 2640,2995 2607,2995 2597.44,3004.56
PA05: CN.13 U100.73 | length 962.9
  Top Layer w6: CN.13@2134,2842.92 2137.81,2846.73 2307.27,2846.73 2313,2841 2343.91,2841 2557.91,3055 2801,3055 2874.58,2981.42 U100.73@2874.58,2931.13 ; CN.13@2171.42,2840.93 cw(c2185.42,2826.93) 2185.42,2846.73 ; CN.13@2175.66,2836.69 cw(c2199.91,2812.45) 2199.91,2846.73 ; CN.13@2175.66,2849.15 ccw(c2181.5,2854.99) 2181.5,2846.73
PA06: CN.12 U100.71 | length 1046.7
  Top Layer w6: v1(2327,2867) 2352.94,2867 2552.94,3067 2818,3067 2913.95,2971.05 U100.71@2913.95,2931.13 ; v1@2333.23,2860.77 cw(c2348.27,2845.73) 2348.27,2867 cw(c2348.27,2888.27) v1@2333.23,2873.23
  Bottom Layer w6: CN.12@2134,2857.42 2292.42,2857.42 2302,2867 v1(2327,2867) ; CN.12@2175.66,2851.19 cw(c2190.7,2836.15) 2190.7,2857.42 cw(c2190.7,2878.69) CN.12@2175.66,2863.65 ; v1@2320.77,2860.77 ccw(c2305.73,2845.73) 2305.73,2867 ccw(c2305.73,2888.27) v1@2320.77,2873.23
PA07: CN.11 U100.70 | length 1005.5
  Top Layer w6: CN.11@2134,2874.42 2292.42,2874.42 2306,2888 2356.97,2888 2547.97,3079 2831,3079 2933.64,2976.36 U100.70@2933.64,2931.13 ; CN.11@2175.66,2868.19 cw(c2190.7,2853.15) 2190.7,2874.42 cw(c2190.7,2895.69) CN.11@2175.66,2880.65
PA08: CN.10 U100.69 | length 1089.2
  Top Layer w6: v1(2346,2911) 2363,2911 ; v1@2353.2,2905.92 cw(c2363,2899.01) 2363,2911 ; v1@2353.2,2916.08 ccw(c2363,2922.99) 2363,2911 ; U100.69@2953.32,2931.13 2953.32,2982.68 2845,3091 2543,3091 2363,2911
  Bottom Layer w6: CN.10@2134,2888.91 2323.91,2888.91 v1(2346,2911) ; CN.10@2175.66,2882.68 cw(c2190.7,2867.64) 2190.7,2888.91 cw(c2190.7,2910.18) CN.10@2175.66,2895.14 ; v1@2337.19,2911 cw(c2315.92,2911) 2330.96,2895.96 cw(c2346,2880.92) v1@2346,2902.19
PA09: CN.52 U100.64 | length 2166.7
  Top Layer w6: v1(2309,2024) 2406,2024 2533,2151 2949,2151 3193,2395 3193,2493 3236,2536 v1(3236,2571) ; v1@2315.23,2017.77 cw(c2330.27,2002.73) 2330.27,2024 cw(c2330.27,2045.27) v1@2315.23,2030.23 ; v1(2985.46,2856.32) U100.64@3028.13,2856.32 ; v1@2991.69,2850.09 cw(c3006.74,2835.05) 3006.74,2856.32 cw(c3006.74,2877.59) v1@2991.69,2862.55 ; v1@3229.77,2564.77 cw(c3214.73,2549.73) 3236,2549.73 cw(c3257.27,2549.73) v1@3242.23,2564.77
  Bottom Layer w6: CN.52@2134,2101.51 2205.49,2101.51 2283,2024 v1(2309,2024) ; CN.52@2175.66,2095.28 cw(c2190.7,2080.24) 2190.7,2101.51 cw(c2190.7,2122.78) CN.52@2175.66,2107.74 ; v1@2302.77,2017.77 ccw(c2287.73,2002.73) 2287.73,2024 ccw(c2287.73,2045.27) v1@2302.77,2030.23 ; v1(2985.46,2856.32) 3041.32,2856.32 3048,2863 3076,2863 3236,2703 v1(3236,2571) ; v1@2991.69,2850.09 cw(c3006.74,2835.05) 3006.74,2856.32 cw(c3006.74,2877.59) v1@2991.69,2862.55 ; v1@3229.77,2577.23 ccw(c3214.73,2592.27) 3236,2592.27 ccw(c3257.27,2592.27) v1@3242.23,2577.23
PA10: CN.51 U100.63 | length 1945.3
  Top Layer w6: CN.51@2137.81,2122.32 CN.51@2134,2118.51 2207.49,2118.51 2275.81,2050.19 2400.19,2050.19 2513,2163 2944.03,2163 3181,2399.97 3181,2513 3212,2544 v1(3213,2544) ; CN.51@2175.66,2112.28 cw(c2190.7,2097.24) 2190.7,2118.51 cw(c2190.7,2139.78) CN.51@2175.66,2124.74 ; U100.63@3028.13,2836.64 v1(3070.79,2836.64) ; v1@3064.56,2830.41 ccw(c3049.52,2815.37) 3049.52,2836.64 ccw(c3049.52,2857.91) v1@3064.56,2842.87 ; 3196.25,2528.25 cw(c3213,2511.5) v1@3213,2535.19 ; 3198.67,2530.67 ccw(c3185.33,2544) v1@3204.19,2544
  Bottom Layer w6: v1@3070.79,2827.83 cw(c3070.79,2806.56) 3085.83,2821.6 cw(c3100.87,2836.64) v1@3079.6,2836.64 ; v1(3070.79,2836.64) 3212,2695.43 3212,2544 v1(3213,2544) ; v1@3206.77,2550.23 ccw(c3194.14,2562.86) 3212,2562.86 ; 3212,2567.69 ccw(c3236.69,2567.69) v1@3219.23,2550.23
PA11: CN.50 U100.60 | length 1942.6
  Top Layer w6: v1(2285,2071) 2388,2071 2492,2175 2939.06,2175 3169,2404.94 3169,2541 ; v1@2291.23,2064.77 cw(c2306.27,2049.73) 2306.27,2071 cw(c2306.27,2092.27) v1@2291.23,2077.23 ; U100.60@3028.13,2777.58 3068.58,2777.58 ; v1@3074.19,2791.73 cw(c3055.02,2791.15) 3068.58,2777.58 ; v1@3082.73,2783.19 ccw(c3082.15,2764.02) 3068.58,2777.58 ; v1(3083,2792) 3068.58,2777.58 ; v1@3174.2,2554.54 cw(c3156.39,2553.61) 3169,2541 ; v1@3182.54,2546.2 ccw(c3181.61,2528.39) 3169,2541 ; v1(3183,2555) 3169,2541
  Bottom Layer w6: CN.50@2134,2133.01 2195.99,2133.01 2258,2071 v1(2285,2071) ; CN.50@2175.66,2126.78 cw(c2190.7,2111.74) 2190.7,2133.01 cw(c2190.7,2154.28) CN.50@2175.66,2139.24 ; v1@2278.77,2064.77 ccw(c2263.73,2049.73) 2263.73,2071 ccw(c2263.73,2092.27) v1@2278.77,2077.23 ; v1(3083,2792) 3097.42,2777.58 ; v1@3083.27,2783.19 cw(c3083.85,2764.02) 3097.42,2777.58 ; v1@3091.81,2791.73 ccw(c3110.98,2791.15) 3097.42,2777.58 ; v1(3183,2555) 3199,2571 3199,2691.45 3112.87,2777.58 3097.42,2777.58 ; v1@3183,2563.81 ccw(c3183,2585.08) 3198.04,2570.04 ccw(c3213.08,2555) v1@3191.81,2555
PA12: CN.49 U100.59 | length 1877
  Top Layer w6: CN.49@2140.31,2143.69 CN.49@2134,2150.01 2192.96,2150.01 2250.97,2092 2384,2092 2479,2187 2934.09,2187 3157,2409.91 3157,2577 ; CN.49@2175.66,2143.78 cw(c2190.7,2128.74) 2190.7,2150.01 cw(c2190.7,2171.28) CN.49@2175.66,2156.24 ; v1(2985.46,2757.9) U100.59@3028.13,2757.9 ; v1@2991.69,2751.67 cw(c3006.74,2736.63) 3006.74,2757.9 cw(c3006.74,2779.17) v1@2991.69,2764.13 ; v1@3162.2,2590.54 cw(c3144.39,2589.61) 3157,2577 ; v1@3170.54,2582.2 ccw(c3169.61,2564.39) 3157,2577 ; v1(3171,2591) 3157,2577
  Bottom Layer w6: v1(2985.46,2757.9) 2986.59,2759.02 3113.98,2759.02 3182,2691 3182,2602 v1(3171,2591) ; v1@2991.69,2751.67 cw(c3009.45,2733.91) 3009.45,2759.02 ; v1@2991.69,2764.13 ccw(c3004.02,2776.45) 3004.02,2759.02
PA13: CN.48 U100.58 | length 1804.4
  Top Layer w6: v1(2261,2114) 2380,2114 2465,2199 2929.12,2199 3145,2414.88 3145,2610 ; v1@2267.23,2107.77 cw(c2282.27,2092.73) 2282.27,2114 cw(c2282.27,2135.27) v1@2267.23,2120.23 ; U100.58@3028.13,2738.21 v1(3070.79,2738.21) ; v1@3064.56,2731.98 ccw(c3049.52,2716.94) 3049.52,2738.21 ccw(c3049.52,2759.48) v1@3064.56,2744.44 ; v1@3148.32,2620.49 cw(c3136.56,2618.44) 3145,2610 ; v1@3155.49,2613.32 ccw(c3153.44,2601.56) 3145,2610 ; v1(3157,2622) 3145,2610
  Bottom Layer w6: CN.48@2134,2164.5 2187.44,2164.5 ; CN.48@2176.39,2159.1 cw(c2187.44,2150.51) 2187.44,2164.5 ; CN.48@2176.39,2169.91 ccw(c2187.44,2178.49) 2187.44,2164.5 ; v1@2254.77,2107.77 ccw(c2239.73,2092.73) 2239.73,2114 ccw(c2239.73,2135.27) v1@2254.77,2120.23 ; v1(2261,2114) 2237.94,2114 2187.44,2164.5 ; v1(3070.79,2738.21) 3114.79,2738.21 3157,2696 v1(3157,2622) ; v1@3077.02,2731.98 cw(c3092.06,2716.94) 3092.06,2738.21 cw(c3092.06,2759.48) v1@3077.02,2744.44 ; v1@3150.77,2628.23 ccw(c3135.73,2643.27) 3157,2643.27 ccw(c3178.27,2643.27) v1@3163.23,2628.23
PA14: CN.47 U100.54 | length 1488.5
  Top Layer w6: CN.47@2134,2181.5 2196.5,2181.5 2228,2150 2263,2150 2282,2131 2370,2131 2450,2211 2924.15,2211 3133,2419.85 3133,2610 3083.53,2659.47 U100.54@3028.13,2659.47 ; CN.47@2175.66,2175.27 cw(c2190.7,2160.23) 2190.7,2181.5 cw(c2190.7,2202.77) CN.47@2175.66,2187.73
PA15: CN.46 U100.53 | length 1496.5
  Top Layer w6: v1(2302,2154.24) 2365.24,2154.24 2434,2223 2919.18,2223 3121,2424.82 3121,2592 3073.21,2639.79 U100.53@3028.13,2639.79 ; v1@2308.23,2148 cw(c2323.27,2132.96) 2323.27,2154.24 cw(c2323.27,2175.51) v1@2308.23,2160.47
  Bottom Layer w6: CN.46@2134,2196 2198.24,2196 2240,2154.24 v1(2302,2154.24) ; CN.46@2175.66,2189.77 cw(c2190.7,2174.73) 2190.7,2196 cw(c2190.7,2217.27) CN.46@2175.66,2202.23 ; v1@2295.77,2148 ccw(c2280.73,2132.96) 2280.73,2154.24 ccw(c2280.73,2175.51) v1@2295.77,2160.47
PB00: CN.45 U100.52 | length 1375
  Top Layer w6: CN.45@2134,2213 2194,2213 2231.95,2175.05 2358.05,2175.05 2418,2235 2914.21,2235 3109,2429.79 3109,2576 3064.9,2620.1 U100.52@3028.13,2620.1 ; CN.45@2175.66,2206.77 cw(c2190.7,2191.73) 2190.7,2213 cw(c2190.7,2234.27) CN.45@2175.66,2219.23
PB01: CN.44 U100.48 | length 1335.6
  Top Layer w6: v1(2299,2197.65) 2353.65,2197.65 2403,2247 2909.24,2247 3097,2434.76 3097,2518 3073.64,2541.36 U100.48@3028.13,2541.36 ; v1@2305.23,2191.42 cw(c2320.27,2176.38) 2320.27,2197.65 cw(c2320.27,2218.92) v1@2305.23,2203.88
  Bottom Layer w6: CN.44@2134,2227.5 2210.15,2227.5 2240,2197.65 v1(2299,2197.65) ; CN.44@2175.66,2221.27 cw(c2190.7,2206.22) 2190.7,2227.5 cw(c2190.7,2248.77) CN.44@2175.66,2233.73 ; v1@2292.77,2191.42 ccw(c2277.73,2176.38) 2277.73,2197.65 ccw(c2277.73,2218.92) v1@2292.77,2203.88
PB02: CN.43 U100.47 | length 1214.7
  Top Layer w6: CN.43@2134,2244.5 2197.5,2244.5 2223.54,2218.46 2338.54,2218.46 2379.08,2259 2904.27,2259 3085,2439.73 3085,2503 3066.32,2521.68 U100.47@3028.13,2521.68 ; CN.43@2175.66,2238.27 cw(c2190.7,2223.22) 2190.7,2244.5 cw(c2190.7,2265.77) CN.43@2175.66,2250.73
PB03: CN.42 U100.46 | length 1223
  Top Layer w6: v1(2240,2241.06) 2332.06,2241.06 2362,2271 2899.3,2271 3072,2443.7 3072,2487 3057.01,2501.99 U100.46@3028.13,2501.99 ; v1@2246.23,2234.83 cw(c2261.27,2219.79) 2261.27,2241.06 cw(c2261.27,2262.33) v1@2246.23,2247.29
  Bottom Layer w6: CN.42@2134,2258.99 2222.07,2258.99 v1(2240,2241.06) ; CN.42@2175.66,2252.76 cw(c2190.7,2237.72) 2190.7,2258.99 cw(c2190.7,2280.26) CN.42@2175.66,2265.22 ; v1@2231.19,2241.06 ccw(c2209.92,2241.06) 2224.96,2256.1 ccw(c2240,2271.14) v1@2240,2249.87
PB04: CN.41 U100.45 | length 1103
  Top Layer w6: CN.41@2134,2275.99 2256.01,2275.99 2270.13,2261.87 2321.87,2261.87 2343,2283 2894.32,2283 3059,2447.68 3059,2476 3052.69,2482.31 U100.45@3028.13,2482.31 ; CN.41@2175.66,2269.76 cw(c2190.7,2254.72) 2190.7,2275.99 cw(c2190.7,2297.26) CN.41@2175.66,2282.22